# Altium PCB battery-module-60mm-side.PcbDoc
Units mm, origin at the board's own origin, x right, y up, seen from the top; angles counter-clockwise.
Board outline 52 x 21.2 mm, 2 copper layers (Top Layer, Bottom Layer), stack 1.591 mm thick; 29 components, 23 nets, 106 pads, 26 vias.
Unrouted connection lines stored in the file: 36.
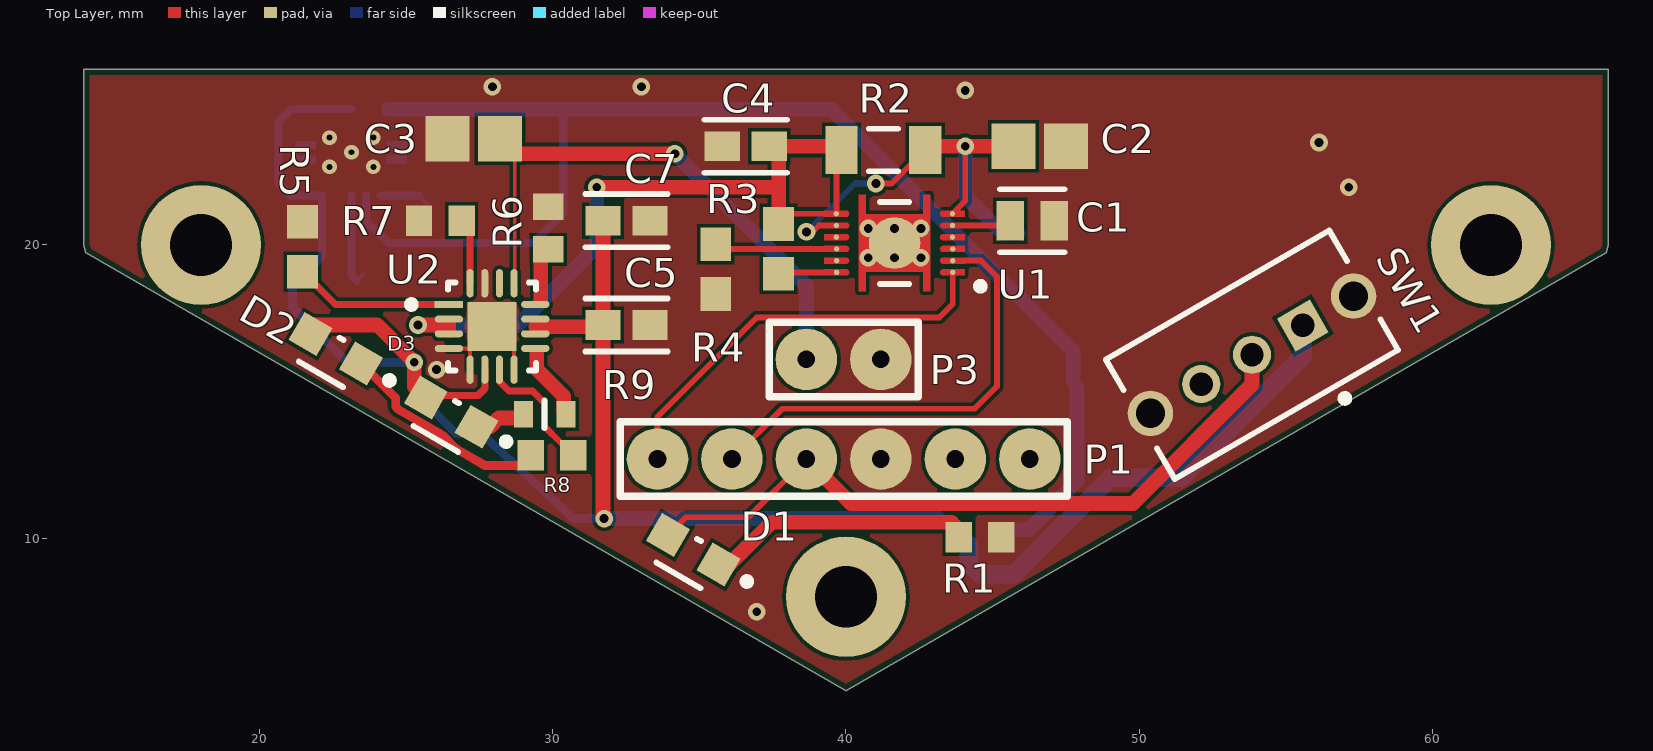
[diagram p0: Top Layer view]
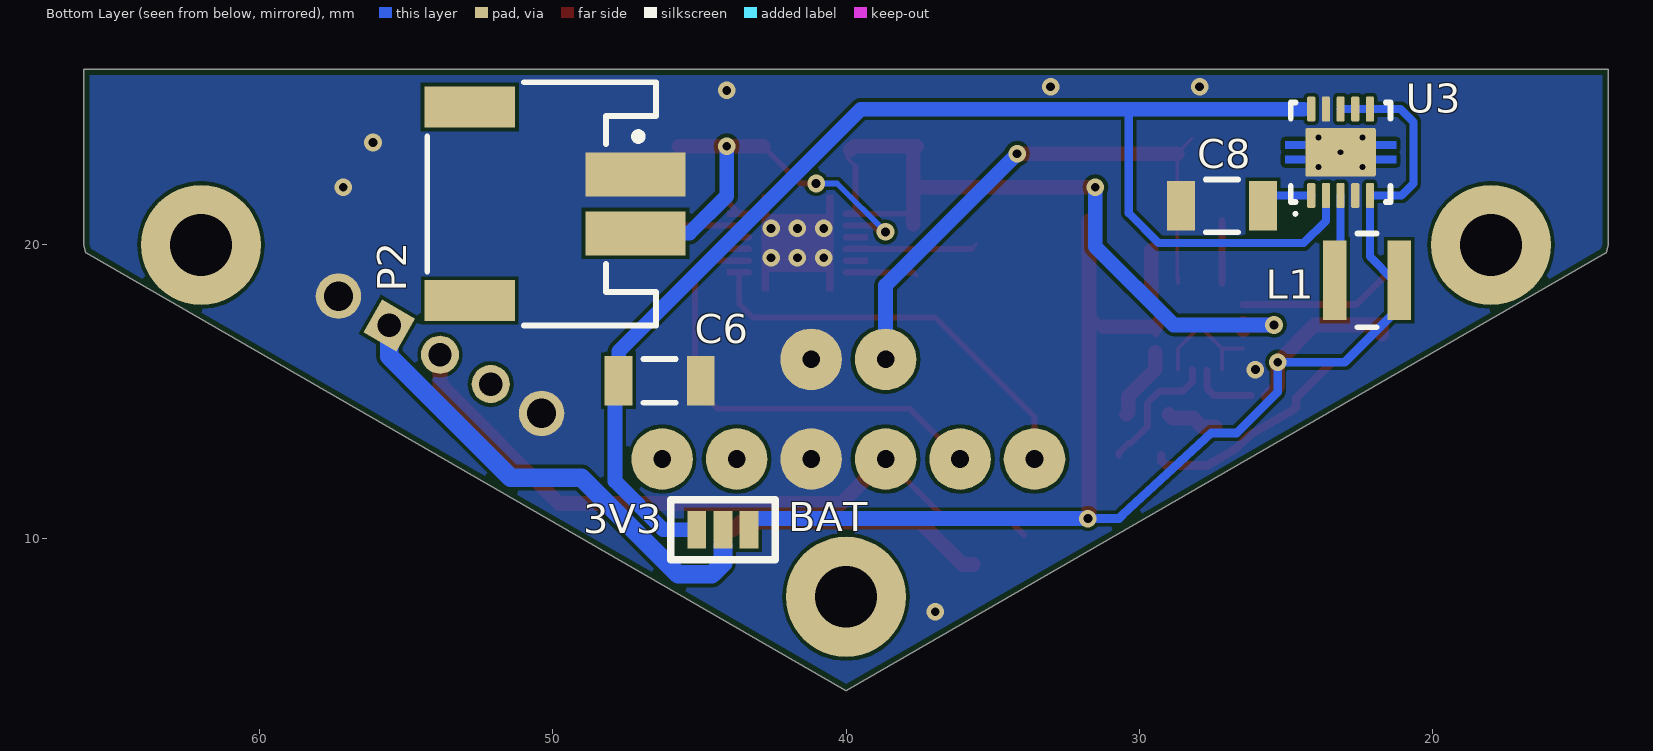
[diagram p1: Bottom Layer view, seen from below]
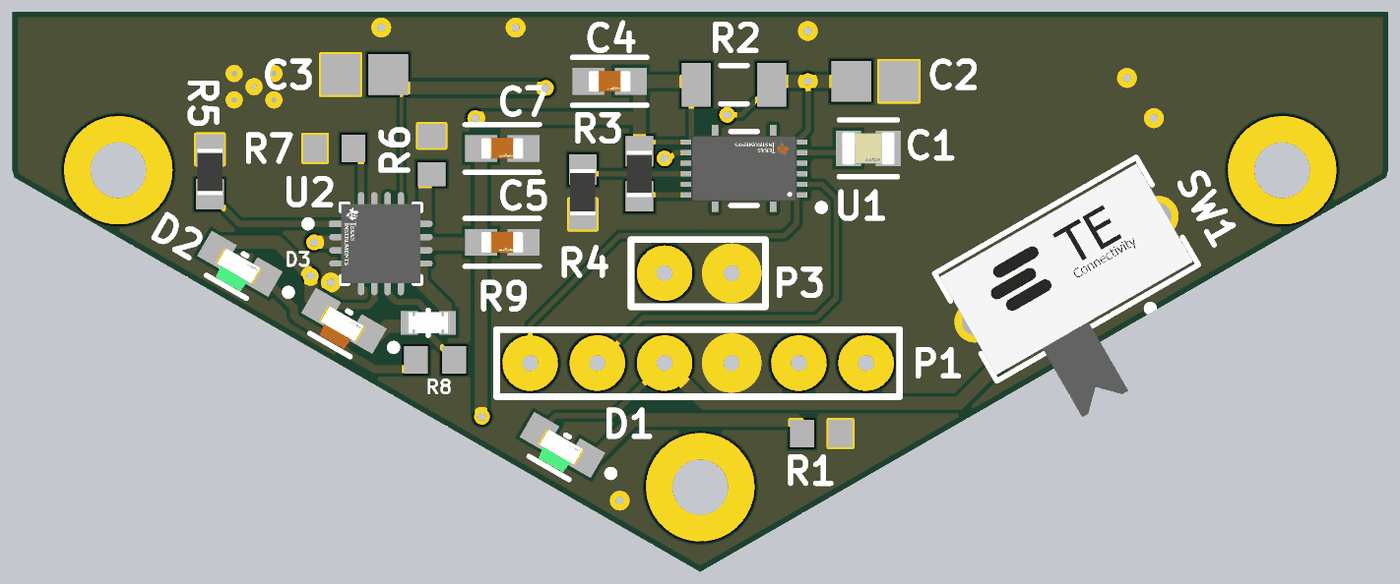
[diagram p2: 3D render of the assembled board from above, using the file's embedded part models]
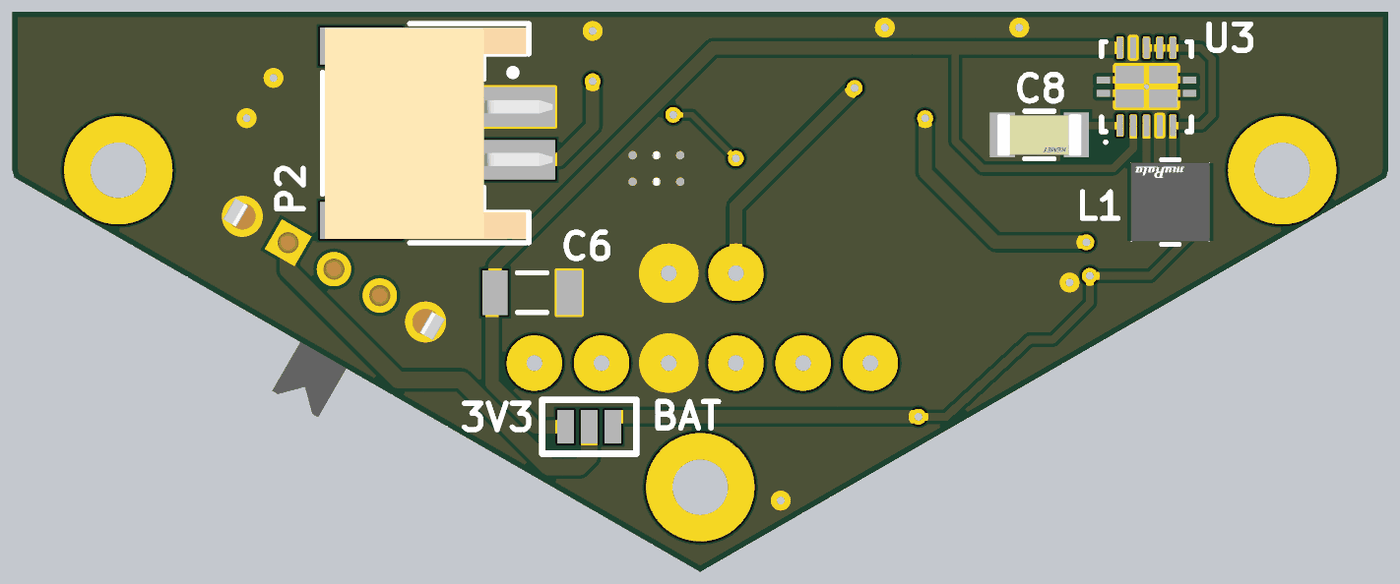
[diagram p3: 3D render of the assembled board from below, using the file's embedded part models]

## Layer stack, top to bottom
Top Solder: solder mask 0.0102, Solder Resist, Dk 3.5
Top Layer: signal copper 0.0356
Dielectric 1: dielectric 1.52, FR-4, Dk 4.8
Bottom Layer: signal copper 0.0356
Bottom Solder: solder mask 0.0102, Solder Resist, Dk 3.5

## Board outline
14.072,19.731 14,20 14,26 66,26 66,20 65.927,19.73 40,4.8

## Design rules (kind name [scope] priority, off if disabled: settings)
BoardOutlineClearance [All] p1: gap=0.2 ignorepadtopadclearanceinfootprint=FALSE
Clearance [All] p1: gap=0.127 ignorepadtopadclearanceinfootprint=FALSE except(0.25: Arc-Hole Track-Hole SMDPad-Hole THPad-Hole Via-Hole Fill-Hole Poly-Hole Region-Hole Text-Hole)
ComponentClearance [All] p1: gap=0.127 collisioncheckmode=3 verticalgap=0.127 showdistances=TRUE
DiffPairsRouting [All] p1: maxlimit=0.254 minlimit=0.127 mostfreqgap=0.127 toplayer_minwidth=0.127 toplayer_maxwidth=25.4 toplayer_prefwidth=0.127 bottomlayer_minwidth=0.127 bottomlayer_maxwidth=25.4 bottomlayer_prefwidth=0.127 maxuncoupledlength=12.7
Height [All] p1: minheight=0 maxheight=1816.048 prefheight=12.7
HoleSize [All] p1: absolutevalues=TRUE maxlimit=6.3 minlimit=0.3 maxpercent=80.000 minpercent=20.000
HoleToHoleClearance [All] p1: gap=0.25 allowstackedmicrovias=FALSE
MinimumAnnularRing [All] p1: minimumring=0.076
MinimumSolderMaskSliver [All] p1: minsoldermaskwidth=0
NetsToIgnore [InNet('GND')] p1:
PlaneClearance [All] p1: clearance=0.127
PlaneConnect PlaneConnectPowerPads [InPadClass('PowerPads')] p1: planeconnectstyle=Direct reliefexpansion=0.508 reliefentries=4 reliefconductorwidth=0.254 reliefairgap=0.254
PlaneConnect [All] p2: pad.planeconnectstyle=Relief pad.reliefexpansion=0.3 pad.reliefentries=4 pad.reliefconductorwidth=0.127 pad.reliefairgap=0.127 via.planeconnectstyle=Direct via.reliefexpansion=0.3 via.reliefentries=4 via.reliefconductorwidth=0.127 via.reliefairgap=0.127
PolygonConnect PolygonConnectPowerPads [All vs (InPadClass('PowerPads'))] p1: connectstyle=Direct reliefconductorwidth=0.254 reliefentries=4 polygonreliefangle="90 Angle" airgapwidth=0.254
PolygonConnect [All] p2: connectstyle=Direct reliefconductorwidth=0.2 reliefentries=4 polygonreliefangle="90 Angle" airgapwidth=0.127
RoutingLayers [InNet('GND')] p1: top layer_v5=FALSE bottom layer_v5=FALSE
RoutingPriority [InNet('GND')] p1: routingpriority=100
RoutingVias [All] p1: holewidth=0.3 width=0.6 viastyle="Through Hole" minholewidth=0.3 minwidth=0.6 maxholewidth=0.6 maxwidth=6.6
SilkToSilkClearance [All] p1: silktosilkclearance=0
SilkToSolderMaskClearance [IsPad] p1: minsilkscreentomaskgap=0.127 clearancetoexposedcopper=TRUE
SolderMaskExpansion [All] p1: expansion=0.075 istentingtop=FALSE
Width [All] p1: maxlimit=25.4 minlimit=0.127 preferedwidth=0.127 minimp=50.000000 maximp=50.000000 favimp=50.000000
18 further rules are at their usual default settings.

## Components (designator, comment, footprint, x,y, rotation, side; value= is the part's Value field where it differs from the comment)
3V3 "SJUMPER3POS" SJUMPER3POS-Footprint-1 44.196,10.287 r0 bottom (schematic designator SJ1)
C1 "C0805C474K4RACTU" FP-C0805C-DN-MFG 46.355,20.828 r180 top value="0.47 μF"
C2 "C0805C105K4PACTU" CAPC2013X145X50ML20T25 46.609,23.368 r180 top
C3 "C0805C105K4PACTU" CAPC2013X145X50ML20T25 27.305,23.622 r180 top
C4 "GRM188R60J106ME47D" FP-GRM188-0_1-e0_2_0_55-IPC_A 36.576,23.368 r0 top
C5 "GRM188R60J106ME47D" FP-GRM188-0_1-e0_2_0_55-IPC_A 32.512,17.272 r0 top
C6 "CAP 22uF 6.3V 1206(3216)" CAPC1206(3216)190_L 46.355,15.367 r0 bottom value=22uF
C7 "GRM188R60J106ME47D" FP-GRM188-0_1-e0_2_0_55-IPC_A 32.512,20.828 r0 top
C8 "C1206C104K1RACTU" FP-C1206C-EB-MFG 27.178,21.336 r0 bottom value="0.10 μF"
D1 "LTST-S270KGKT" FP-LTST-S270KGKT-MFG 34.671,9.398 r150 top
D2 "LTST-S270KGKT" FP-LTST-S270KGKT-MFG 22.479,16.256 r150 top
D3 "LTST-S270KRKT" FP-LTST-S270KRKT-MFG 26.416,14.097 r150 top
L1 "LQH3NPN2R2MJRL" FP-LQH3NPN_JR-MFG 22.225,18.796 r0 bottom
P1 "811-S1-006-30-015101" "New footprint 1" 39.92,12.7 r0 top
P2 "620102131822" 620102131822 50.382,21.4 r270 bottom
P3 "811-S1-002-30-015101" 811-S1-002-30-015101-Footprint-1 39.92,16.1 r0 top
R1 "ERJ-3EKF1001V" RESC1608X55X30ML15T15 44.577,10.033 r180 top
R2 "ERJ8BWFR010V" RESC3216X70X50NL05T20 41.275,23.241 r0 top
R3 "ERJ3EKF1002V" RESC1609X55X30ML15T15 37.701,19.866 r270 top
R4 "ERJ3EKF1002V" RESC1609X55X30ML15T15 35.56,19.177 r90 top
R5 "ERJ3EKF1002V" RESC1609X55X30ML15T15 21.463,19.939 r270 top
R6 "ERJ-3EKF1101V" RESC1608X55X30ML15T15 29.845,20.574 r270 top
R7 "ERJ-3EKF5903V" RESC1608X55X30ML15T15 26.162,20.828 r0 top
R8 "ERJ-3EKF1001V" RESC1608X55X30ML15T15 29.972,12.827 r180 top
R9 "ERJ3EKF1800V" FP-ERJ3EK-MFG 29.718,14.224 r180 top value=180Ω
SW1 "1825232-1" FP-1825232-1-MFG 53.848,16.256 r210 top
U1 "BQ27441DRZT-G1A" FP-DRZ0012A-MFG 41.656,20.066 r90 top
U2 "BQ24075RGTR" FP-RGT0016C-IPC_A 27.928,17.221 r0 top
U3 "TPS61201DRCT" DRC0010J_V 23.13,23.163 r90 bottom

## Footprints (in the part's own frame and the unit in brackets; to place one, negate y for a bottom-side part, rotate by r counter-clockwise, add the part's x,y. Pads: shape width x height; smd on the part's side, far side on the other; paste and mask are expansions set on the pad)
811-S1-002-30-015101-Footprint-1 [mm]
  round 2.1 hole 0.6: 1(-1.27,0) 2(1.27,0)
  silkscreen extent -2.54,-1.27 2.54,1.27
620102131822 [mm] "2.00mm SMT Male Horizontal Shrouded Header, 2p"
  rect 1.5x3.4 smd: 1(-1,3.2) 2(1,3.2)
  rect 1.4x3.1 smd: MP1(-3.3,-2.45) MP2(3.3,-2.45)
  silkscreen extent -4.15,-3.9 4.15,3.9, body extent -4,-3.8 4,4.8, height 5.57
CAPC1206(3216)190_L [mm] "Chip Capacitor, Body 3.2x1.6mm, Height 1.9mm, IPC High Density"
  rect 0.95x1.7 smd: 1(-1.4,0) 2(1.4,0)
  silkscreen extent -0.55,-0.75 0.55,0.75, body extent -1.7,-0.9 1.7,0.9, height 1.9
CAPC2013X145X50ML20T25 [mm] "Chip Capacitor, 2-Leads, Body 2.00x1.25mm, IPC Low Density"
  rect 1.5x1.55 smd: 1(-0.9,0) 2(0.9,0)
  body extent -1.1,-0.72 1.1,0.72, height 1.45
DRC0010J_V [mm] "SON, 10-Leads, Body 3x3mm, Pitch 0.5mm, Thermal Pad 2.4x1.65mm, TI Recommended"
  rrect36% 0.85x0.28 smd paste-0.025 mask+0.07: 1(-1.475,1) 2(-1.475,0.5) 3(-1.475,0) 4(-1.475,-0.5) 5(-1.475,-1) 6(1.475,-1) 7(1.475,-0.5) 8(1.475,0) 9(1.475,0.5) 10(1.475,1)
  rrect6% 1.65x2.4 smd paste-0.825 mask+0.07: 11(0,0)
  Top Layer region: -0.39,-1.2 -0.11,-1.2 -0.11,-1.9 -0.39,-1.9
  Top Layer region: 0.39,-1.9 0.11,-1.9 0.11,-1.2 0.39,-1.2
  Top Layer region: 0.39,1.2 0.11,1.2 0.11,1.9 0.39,1.9
  Top Layer region: -0.39,1.9 -0.11,1.9 -0.11,1.2 -0.39,1.2
  silkscreen extent -2.15,-1.7 1.7,1.7, body extent -1.55,-1.55 1.55,1.55, height 1
FP-1825232-1-MFG [mm]
  rect 1.3x1.3 hole 0.8 paste-1000 mask+0: 1(-2,0)
  round 1.3 hole 0.8 paste-1000 mask+0: 2(0,0) 3(2,0)
  round 1.55 hole 1 paste-1000 mask+0: 4(-4,0) 5(4,0)
  silkscreen extent -4.4,-2.35 4.4,3, body extent -4.87,-5.45 4.87,2.45, height 0.25
FP-C0805C-DN-MFG [mm]
  rect 0.95x1.35 smd paste+0 mask+0: 1(-0.75,0) 2(0.75,0)
  silkscreen extent -1.1,-1.07 1.1,1.07, body extent -1,-0.63 1,0.63, height 0.88
FP-C1206C-EB-MFG [mm]
  rect 0.95x1.7 smd paste+0 mask+0: 1(-1.4,0) 2(1.4,0)
  silkscreen extent -0.55,-0.9 0.55,0.9, body extent -1.6,-0.8 1.6,0.8, height 0.88
FP-DRZ0012A-MFG [mm]
  round 0.18 smd paste-1000 mask+0: 1(-1,-1.985) 2(-0.6,-1.985) 3(-0.2,-1.985) 4(0.2,-1.975) 5(0.6,-1.975) 6(1,-1.975) 7(1,1.985) 8(0.6,1.985) 9(0.2,1.985) 10(-0.2,1.975) 11(-0.6,1.975) 12(-1,1.975)
  round 1.755 smd paste-1000 mask+0: 13(0,0)
  Top Layer region: -0.9,2.4 -0.9,1.65 -0.913,1.6 -0.95,1.563 -1,1.55 -1,1.55 -1.038,1.558 -1.071,1.579 -1.092,1.612 -1.1,1.65 -1.1,1.65 -1.1,2.4
  Top Layer region: -0.5,2.4 -0.5,1.65 -0.513,1.6 -0.55,1.563 -0.6,1.55 -0.6,1.55 -0.638,1.558 -0.671,1.579 -0.692,1.612 -0.7,1.65 -0.7,1.65 -0.7,2.4
  Top Layer region: -0.1,2.4 -0.1,1.65 -0.113,1.6 -0.15,1.563 -0.2,1.55 -0.2,1.55 -0.238,1.558 -0.271,1.579 -0.292,1.612 -0.3,1.65 -0.3,1.65 -0.3,2.4
  Top Layer region: 0.3,2.4 0.3,1.65 0.287,1.6 0.25,1.563 0.2,1.55 0.2,1.55 0.162,1.558 0.129,1.579 0.108,1.612 0.1,1.65 0.1,1.65 0.1,2.4
  Top Layer region: 0.7,2.4 0.7,1.65 0.687,1.6 0.65,1.563 0.6,1.55 0.6,1.55 0.562,1.558 0.529,1.579 0.508,1.612 0.5,1.65 0.5,1.65 0.5,2.4
  Top Layer region: 1.1,2.4 1.1,1.65 1.087,1.6 1.05,1.563 1,1.55 1,1.55 0.962,1.558 0.929,1.579 0.908,1.612 0.9,1.65 0.9,1.65 0.9,2.4
  Top Layer region: 0.9,-2.4 0.9,-1.65 0.908,-1.612 0.929,-1.579 0.962,-1.558 1,-1.55 1,-1.55 1.038,-1.558 1.071,-1.579 1.092,-1.612 1.1,-1.65 1.1,-1.65 1.1,-2.4
  Top Layer region: 0.5,-2.4 0.5,-1.65 0.508,-1.612 0.529,-1.579 0.562,-1.558 0.6,-1.55 0.6,-1.55 0.638,-1.558 0.671,-1.579 0.692,-1.612 0.7,-1.65 0.7,-1.65 0.7,-2.4
  Top Layer region: 0.1,-2.4 0.1,-1.65 0.108,-1.612 0.129,-1.579 0.162,-1.558 0.2,-1.55 0.2,-1.55 0.238,-1.558 0.271,-1.579 0.292,-1.612 0.3,-1.65 0.3,-1.65 0.3,-2.4
  Top Layer region: -0.3,-2.4 -0.3,-1.65 -0.292,-1.612 -0.271,-1.579 -0.238,-1.558 -0.2,-1.55 -0.2,-1.55 -0.162,-1.558 -0.129,-1.579 -0.108,-1.612 -0.1,-1.65 -0.1,-1.65 -0.1,-2.4
  Top Layer region: -0.7,-2.4 -0.7,-1.65 -0.692,-1.612 -0.671,-1.579 -0.638,-1.558 -0.6,-1.55 -0.6,-1.55 -0.562,-1.558 -0.529,-1.579 -0.508,-1.612 -0.5,-1.65 -0.5,-1.65 -0.5,-2.4
  Top Layer region: -1.1,-2.4 -1.1,-1.65 -1.092,-1.612 -1.071,-1.579 -1.038,-1.558 -1,-1.55 -1,-1.55 -0.962,-1.558 -0.929,-1.579 -0.908,-1.612 -0.9,-1.65 -0.9,-1.65 -0.9,-2.4
  Top Layer region: -1.65,1.225 1.65,1.225 1.65,0.975 0.975,0.975 0.975,-0.975 1.65,-0.975 1.65,-1.225 -1.65,-1.225 -1.65,-0.975 -0.975,-0.975 -0.975,0.975 -1.65,0.975 -1.65,1.225
  silkscreen extent -1.6,-3.05 1.4,0.5, body extent -1.25,-2 1.25,2, height 1
FP-ERJ3EK-MFG [mm]
  rect 0.65x0.9 smd paste+0 mask+0: 1(-0.725,0) 2(0.725,0)
  silkscreen extent 0,-0.47 0,0.47, body extent -1.15,-0.58 1.15,0.58, height 0.25
FP-GRM188-0_1-e0_2_0_55-IPC_A [mm]
  rect 1.208x1.012 smd paste+0 mask+0: 1(-0.802,0) 2(0.802,0)
  silkscreen extent -1.41,-0.91 1.41,0.91, body extent -0.8,-0.4 0.8,0.4, height 0.9
FP-LQH3NPN_JR-MFG [mm]
  rect 0.8x2.7 smd paste+0 mask+0: 1(-1.1,0) 2(1.1,0)
  silkscreen extent -0.33,-1.6 0.33,1.6, body extent -1.5,-1.5 1.5,1.5, height 1.2
FP-LTST-S270KGKT-MFG [mm]
  rect 1.1x1.1 smd paste+0 mask+0: 1(-1,-0.235) 2(1,-0.235)
  silkscreen extent -2.25,-0.62 0.88,0.78, body extent -1.65,-0.88 1.65,0.73, height 0.25
FP-LTST-S270KRKT-MFG [mm]
  rect 1.1x1.1 smd paste+0 mask+0: 1(-1,-0.235) 2(1,-0.235)
  silkscreen extent -2.25,-0.63 0.88,0.83, body extent -1.65,-0.88 1.65,0.73, height 0.25
FP-RGT0016C-IPC_A [mm]
  rect 0.966x0.239 smd paste+0 mask+0: 1(-1.473,0.75)
  rrect100% 0.966x0.239 smd paste+0 mask+0: 2(-1.473,0.25) 3(-1.473,-0.25) 4(-1.473,-0.75) 9(1.473,-0.75) 10(1.473,-0.25) 11(1.473,0.25) 12(1.473,0.75)
  rrect100% 0.239x0.966 smd paste+0 mask+0: 5(-0.75,-1.473) 6(-0.25,-1.473) 7(0.25,-1.473) 8(0.75,-1.473) 13(0.75,1.473) 14(0.25,1.473) 15(-0.25,1.473) 16(-0.75,1.473)
  rect 1.68x1.68 smd paste-1000 mask+0: 17(0,0)
  silkscreen extent -2.88,-1.5 1.5,1.5, body extent -2.46,-2.46 2.46,2.46, height 0.25
"New footprint 1" [mm]
  round 2.1 hole 0.6: 1(-6.35,0) 2(-3.81,0) 3(-1.27,0) 4(1.27,0) 5(3.81,0) 6(6.35,0)
  silkscreen extent -7.62,-1.27 7.62,1.27
RESC1608X55X30ML15T15 [mm] "Chip Resistor, 2-Leads, Body 1.60x0.80mm, IPC Low Density"
  rect 0.9x1.05 smd: 1(-0.725,0) 2(0.725,0)
  body extent -0.87,-0.48 0.87,0.48, height 0.55
RESC1609X55X30ML15T15 [mm] "Chip Resistor, 2-Leads, Body 1.75x0.95mm, IPC Low Density"
  rect 1.15x1.05 smd: 1(-0.85,0) 2(0.85,0)
  body extent -0.87,-0.48 0.87,0.48, height 0.55
RESC3216X70X50NL05T20 [mm] "Chip Resistor, 2-Leads, Body 3.20x1.60mm, IPC Medium Density"
  rect 1.1x1.65 smd: 1(-1.425,0) 2(1.425,0)
  silkscreen extent -0.5,-0.73 0.5,0.73, body extent -1.63,-0.82 1.62,0.82, height 0.7
SJUMPER3POS-Footprint-1 [mil]
  rect 25x50 smd: 1(-35,0) 2(0,0) 3(35,0)
  silkscreen extent -70,-40 70,40

## Part data
3V3: library part CMP-001-0001-1, "3 pins solder jumper"
C1: library part CMP-2007-03296-2, "CAP CER 0.47UF 16V 10% X7R 0805", Capacitance="0.47 μF", Manufacturer=KEMET, Package=C0805C-DN, Temperature="-55°C to +125°C", Temperature Characteristic=X7R, Temperature Coefficient=30ppm/°C, Temperature Range High=+125°C, Temperature Range Low=-55°C, Tolerance=0.1, Voltage Rating="16 V", Automotive=No, Category=Cap, ComponentLink2Description=Datasheet, ComponentLink2URL=https://content.kemet.com/datasheets/KEM_C1003_C0G_SMD.pdf, Device Class L1="Passive Components", Device Class L2=Capacitors, Device Class L3="Ceramic Capacitors", Digikey Description="CAP CER 0.47UF 16V 10% X7R 0805", Height=0.88mm, Ipc Land Pattern Name=CAPC200125X78, Lead Free=Yes, Manufacturer Part Number=C0805C474K4RACTU, Material=Ceramic, Mouser Description="Multilayer Ceramic Capacitor, C Series, 0.47 - F, - 10%, X7r, 16 V, 0805 [2012 Metric] Rohs Compliant: Yes", Octopart=https://octopart.com/c0805c474k4ractu-kemet-107561, RoHS=TRUE
C2 C3: library part CMP-1036-04746-2, Manufacturer=Kemet, Part Number=C0805C105K4PACTU
C4 C5 C7: library part CMP-2006-02792-2, "Chip Multilayer Ceramic Capacitors for General Purpose, 0603, 10uF, X5R, 15%, 20%, 6.3V", Capacitance=10uF, Case Code (Imperial)=0603, Case Code (Metric)=1608, Dielectric=X5R, Max Operating Temperature=85°C, Min Operating Temperature=-55°C, Package Quantity=4000, Tolerance=20%, Voltage=6.3V, Case/Package=0603, Depth=0.8mm, Height=0.8mm, Lead Free="Lead Free", Length=1.6mm, Material=Ceramic, Mount="Surface Mount", Packaging="Tape and Reel", Radiation Hardening=No, REACH SVHC="No SVHC", Termination=SMD/SMT, Thickness=0.035inch, Voltage Rating=6.3V, Voltage Rating (DC)=6.3V, Width=0.031inch
C6: library part CMP-1037-04986-1, "CAP 22uF 6.3V ±20% 1206 (3216 Metric) Thickness 1.9mm SMD", Case-EIA=1206, Case-Metric=3216, Rated Voltage="6.3 V", Tolerance=Â±20%, Max Thickness="1.9 mm", Technology=SMT
C8: library part CMP-03020-000153-1, "CAP CER 0.1UF 100V X7R 1206", Capacitance="0.10 μF", Manufacturer=KEMET, Package=C1206C-EB, Temperature="-55°C to +150°C", Temperature Characteristic=X7R, Temperature Coefficient=15%, Temperature Range High=+150°C, Temperature Range Low=-55°C, Tolerance=0.1, Voltage Rating="100 V", Automotive=Yes, Automotive Grade="Grade 0", Category=Cap, ComponentLink2Description=Datasheet, ComponentLink2URL=https://content.kemet.com/datasheets/KEM_C1007_X8R_ULTRA_150C_SMD.pdf, Device Class L1="Passive Components", Device Class L2=Capacitors, Device Class L3="Ceramic Capacitors", Digikey Description="CAP CER 0.1UF 100V X7R 1206", Height=0.88mm, Ipc Land Pattern Name=CAPC320160X78, Lead Free=Yes, Manufacturer Part Number=C1206C104K1RACTU, Material=Ceramic, Mouser Description="CAP CER 0.1UF 100V X7R 1206", Octopart=https://octopart.com/c1206c104k1ractu-kemet-89521, RoHS=TRUE
D1 D2: library part CMP-2000-06629-2, "LED GREEN CLEAR CHIP SMD R/A", Case Code (Imperial)=0603, Case Code (Metric)=1608, Color=Green, Forward Current=30mA, Forward Voltage=2V, Lens Color=Colorless, Max Operating Temperature=85°C, Min Operating Temperature=-55°C, Package Quantity=1, Power Dissipation=75mW, Reverse Voltage=5V, Test Current=20mA, Case/Package=0603, Depth=0.6mm, Dominant Wavelength=571nm, Height=0.6mm, Illumination Color=Green, Lead Free="Lead Free", Length=1.6mm, Lens Style=Diffused, Lens Transparency=Clear, Luminous Intensity=71mcd, Mount="Surface Mount", Number of Elements=1, Number of LEDs=1, Number of Pins=2, Packaging="Tape and Reel", Power Rating=75mW, Radiation Hardening=No, Viewing Angle=130°, Wavelength=574nm, Width=1.15mm
D3: library part CMP-2000-06630-2, "LED RED CLEAR CHIP SMD R/A", Case Code (Imperial)=0603, Case Code (Metric)=1608, Color=Red, Forward Current=30mA, Forward Voltage=2V, Lens Color=Colorless, Max Operating Temperature=85°C, Max Power Dissipation=75mW, Min Operating Temperature=-55°C, Package Quantity=1, Reverse Voltage=5V, Test Current=20mA, Case/Package=0603, Depth=0.6mm, Dominant Wavelength=631nm, Height=0.6mm, Illumination Color=Red, Lead Free="Lead Free", Length=1.6mm, Lens Style=Diffused, Lens Transparency=Clear, Luminous Intensity=54mcd, Mount="Surface Mount", Number of Elements=1, Number of LEDs=1, Number of Pins=2, Packaging="Tape and Reel", Power Dissipation=75mW, Power Rating=75mW, Radiation Hardening=No, Viewing Angle=130°, Wavelength=639nm, Width=1.15mm
L1: library part CMP-06042-014664-1, "Wire Wound Ferrite Inductor for Power Lines 2.2μH ±20% 0.0816Ω 2200mA 1212", Case Code (Imperial)=1212, Case Code (Metric)=3030, Current Rating=980mA, DC Resistance (DCR)=81.6mR, Inductance=2.2uH, Max Operating Temperature=105°C, Min Operating Temperature=-40°C, Resistor Type=Wirewound, Saturation Current=1.8A, Self Resonant Frequency=45MHz, Test Frequency=1MHz, Tolerance=20%, Case/Package=1212, Core Material=Ferrite, Height - Seated (Max)=0.047inch, Length=0.118inch, Mount="Surface Mount", Packaging="Tape and Reel", Shielding=Shielded, Width=0.118inch
P1: library part CMP-002-00071-2, "Conn Spring Piston 6POS SMD"
P2: library part CMP-1502-00669-1, "Male Shrouded Header WR-WTB, SMT, Right Angled, pitch 2 mm, 1 x 2 position", Contact Resistance=20mOhm, Manufacturer="Wurth Elektronik", Operating Temperature=-25to85degC, Working Voltage=100VAC, Datasheet URL=https://katalog.we-online.de/em/datasheet/6201xx131822.pdf, Gender=Male, Manufacturer URL=http://www.we-online.de, Mounting Technology=SMT, Orientation=RightAngled, Package Reference=620102131822, Packaging=TapeandReel, Part Number=620102131822, Pitch=2mm, Position=1x2, Publisher=WurthElektronik
P3: library part CMP-002-00073-2, "Conn Spring Loaded Connector HDR 2 POS 2.54mm Solder ST SMD T/R"
R1 R8: library part CMP-2000-00180-1, Manufacturer=Panasonic, Part Number=ERJ-3EKF1001V
R2: library part CMP-2003-00764-1, Manufacturer=Panasonic, Part Number=ERJ8BWFR010V
R3 R4 R5: library part CMP-1012-00623-3, "Chip Resistor, 10 KOhm, +/- 1%, 0.1 W, -55 to 155 degC, 0603 (1608 Metric), RoHS, Tape and Reel", Case Code (Imperial)=0603, Case Code (Metric)=1608, Manufacturer=Panasonic, Max Operating Temperature=155degC, Max Power Dissipation=100mW, Min Operating Temperature=-55degC, Package Description="2-Pin Surface Mount Device, Body 1.6 x 0.85 mm", Package Quantity=1, Package Reference=603, Resistance=10KOhm, Temperature Coefficient=100ppm\/degreesC, Tolerance=1%, Voltage Rating=75V, Case\/Package=0603, Composition=ThickFilm, Contact Plating=Tin, Datasheet URL=https://industrial.panasonic.com/cdbs/www-data/pdf/RDA0000/AOA0000C304.pdf, Datasheet Version=02/2017, Depth=0.8mm, Height=0.45mm, Lead Free=LeadFree, Length=1.6mm, Manufacturer URL=http://www.panasonic.com/, Military Standard=Not, Mount=SurfaceMount, Mounting Technology=SurfaceMount, Number of Pins=2, Number of Terminations=2, Packaging=TapeandReel, Power Rating=100mW, Radiation Hardening=No, REACH SVHC=NoSVHC, RoHSCompliant=true, Termination=SMD/SMT, Voltage Rating (DC)=75V, Width=0.031inch
R6: library part CMP-2000-00198-1, Manufacturer=Panasonic, Part Number=ERJ-3EKF1101V
R7: library part CMP-2000-00582-1, Manufacturer=Panasonic, Part Number=ERJ-3EKF5903V
R9: library part CMP-2000-00293-2, "RES SMD 180 OHM 1% 1/10W 0603", Manufacturer=Panasonic, Package=ERJ3EK, Power Rating=0.1W, Resistance=180Ω, Temperature="-55°C to +155°C", Temperature Coefficient=100ppm/°C, Temperature Range High=+155°C, Temperature Range Low=-55°C, Tolerance=1%, Voltage Rating=75V, Automotive=Yes, Automotive Grade="Grade 0", Category=Res, ComponentLink2Description=Datasheet, ComponentLink2URL=https://industrial.panasonic.com/cdbs/www-data/pdf/RDA0000/AOA0000C304.pdf, Composition="Thick Film", Device Class L1="Passive Components", Device Class L2=Resistors, Device Class L3="Chip SMD Resistors", Digikey Description="RES SMD 180 OHM 1% 1/10W 0603", Footprint Url=https://industrial.panasonic.com/cdbs/www-data/pdf/RDA0000/DMA0000COL17.pdf, Height=0.55mm, Lead Free=Yes, Manufacturer Part Number=ERJ3EKF1800V, Mouser Description="Thick Film Resistors 0603 180ohms 1% AEC-Q200", Octopart=https://octopart.com/erj-3ekf1800v-panasonic-55421532, RoHS=TRUE, Series=ERJ
SW1: library part CMP-03405-000001-1, "SWITCH SLIDE SPDT 200MA 30V", Contact Current Rating=0.2A, Contact Resistance=20mΩ, Manufacturer="TE Connectivity", Operating Force=200gf, Temperature="-20°C to +70°C", Temperature Range High=+70°C, Temperature Range Low=-20°C, Voltage Rating Dc=30V, Automotive=No, Category=Switch, ComponentLink2Description=Datasheet, ComponentLink2URL=https://www.te.com/commerce/DocumentDelivery/DDEController?Action=showdoc&DocId=Customer+Drawing%7F1825232%7FB2%7Fpdf%7FEnglish%7FENG_CD_1825232_B2.pdf%7F1825232-1, Device Class L1=Electromechanical, Device Class L2=Switches, Device Class L3="Slide Switches", Digikey Description="SWITCH SLIDE SPDT 200MA 30V", Electromechanical Life=10000Cycles, Height=3.7mm, Lead Free=Yes, Manufacturer Part Number=1825232-1, Mount="Through Hole", Mouser Description="Slide Switches SLIDE SWITCH SPDT Right Angle", Octopart=https://octopart.com/1825232-1-te+connectivity-45209882, Package=1825232-1, RoHS=TRUE, Throw Configuration=SPDT
U1: library part CMP-04911-000005-1, "IC BATT FUEL GAUGE LICOO2 12SON", Ambient Temperature Range High=+85°C, Ambient Temperature Range Low=-40°C, Manufacturer="Texas Instruments", Max Supply Voltage=4.5V, Min Supply Voltage=2.45V, Nominal Supply Current=93uA, Output Voltage=1.8V, Package=DRZ0012A, Temperature="-40°C to +85°C", Automotive=No, Category=IC, ComponentLink2Description=Datasheet, ComponentLink2URL=http://www.ti.com/lit/ds/symlink/bq27441-g1.pdf, Device Class L1="Integrated Circuits (ICs)", Device Class L2="Power Management ICs", Device Class L3="Battery Management", Digikey Description="IC BATT FUEL GAUGE LICOO2 12SON", Height=1mm, Lead Free=Yes, Manufacturer Part Number=BQ27441DRZT-G1A, Mouser Description="Battery Management System-Side Impdance Trck Bttry Fuel Gge", Number of Cells=1, Number Of Outputs=1, Octopart=https://octopart.com/bq27441drzt-g1a-texas+instruments-30555831, RoHS=TRUE, Standoff Height=0mm, Temperature Range High=+85°C, Temperature Range Low=-40°C
U2: library part CMP-0321-00238-3, "IC LI-ION CHARGE MGMT 16-QFN", Battery Pack Voltage=4.2V, Case/Package=VQFN, Max Charge Current=1.5A, Max Operating Temperature=125°C, Max Supply Voltage=6.4V, Min Input Voltage=4.3V, Min Operating Temperature=-40°C, Min Supply Voltage=4.35V, Package Quantity=3000, Battery Chemistry=LITHIUM-ION, Contact Plating=Gold, Fault Protection="Over Voltage", Interface=USB, Lead Free="Lead Free", Number of Cells=1, Number of Pins=16, Output Current=1.5A, Output Voltage=4.2V, Packaging="Tape and Reel", Radiation Hardening=No, RoHS Compliant=Yes, Series=-, Weight=0.000808oz
U3: library part CMP-0343-00033-2, "Boost Voltage Converter with 0.3 to 5.5 V Input and 3.3 V Output, -40 to 85 degC, 10-Pin SON (DRC), Green (RoHS & no Sb/Br)", Manufacturer="Texas Instruments", Switching Frequency(Max)(kHz)=1250, ComponentLink1Description=Datasheet, ComponentLink1URL=http://www.ti.com/general/docs/lit/getliterature.tsp?genericPartNumber=TPS61201&fileType=pdf, ComponentLink2Description="Package Specification", ComponentLink2URL=http://www.ti.com/litv/pdf/mpds117k, DatasheetVersion=SLVS577B, Eco-Plan="Green (RoHS & no Sb/Br)", Mounting Technology="Surface Mount", PackageDescription="10-Pin Plastic Small Outline No-Lead, 3 x 3 x 1 mm Body, 0.5 mm Pitch, Exposed Pad", PackageReference=DRC0010J, PackageVersion="revL, Sep-2011", PartNumber=TPS61201DRCT, Preset Vout(V)=3.3, Regulated Outputs(#)=1, SubFamily="Step-Up Regulator", Synchronous Rectification=TRUE, Topology=Boost, Vin(Max)(V)=5.5, Vin(Min)(V)=0.3, Vout(Max)(V)=3.3, Vout(Min)(V)=3.3

## Free pads (board coordinates)
  round 4.1 hole 2.1: 1(40,8) 2(18,20) 3(62,20)

## Via types
v1: diameter 0.6, hole 0.3, Top Layer to Bottom Layer, 21 vias
v2: diameter 0.5, hole 0.2, Top Layer to Bottom Layer, 5 vias

## Nets (pads, with @x,y where several pads share a name; then routed paths per layer and width w, separated by ;. In a path a pad name is that pad's centre, name@x,y a point inside that pad or via, vN(x,y) a via of type N, cw(c..) or ccw(c..) an arc to the next point about the centre after c; other vN are vias at no path point)
3V3: 3V3.3 C6.2 U3.2 U3.10 | length 48.2
  Bottom Layer w0.28: U3.2 23.63,20.82 24.387,20.063 29.334,20.063 30.353,21.082 30.353,24.634 32.002,24.634 ; C6.2@47.628,15.367 47.691,15.303 C6.2@47.879,15.116
  Bottom Layer w0.5: 24.384,24.634 31.919,24.634 ; 32.03,24.634 39.501,24.634 47.755,16.38 C6.2 ; 3V3.3 46.228,10.287 47.879,11.938 C6.2@47.879,15.116
GND: C1.1 C2.1 C3.2 C4.1 C5.2 C6.1 C7.2 C8.2 P1.4 P2.1 P3.2 R1.1 R4.1 R5.1 R6.1 R7.1 SW1.4 SW1.5 U1.3 U1.13 U2.4 U2.5 U2.8 U2.15 U2.17 U3.4 U3.9 U3.11 | length 4.3
  Top Layer w0.127: U2.4 U2.17@27.178,16.471 ; U2.5 U2.17@27.178,16.471 ; U2.8 28.678,16.471 U2.17 U2.17@27.178,16.471
  other v1: 36.957,7.493 26.035,15.748 40.756,19.566 41.656,19.566 42.556,19.566 40.756,20.566 41.656,20.566 42.556,20.566 57.15,21.971 56.134,23.495 44.069,25.273 27.94,25.4 33.02,25.4
  other v2: 22.38,22.663 23.88,22.663 23.13,23.163 22.38,23.663 23.88,23.663
NetC1_2: C1.2 U1.5 | length 2
  Top Layer w0.127: C1.2@45.443,20.666 C1.2
  Top Layer w0.2: U1.5 C1.2@45.443,20.666
NetC2_2: C2.2 P2.2 R2.2 U1.6 U1.8 | length 15.9
  Top Layer w0.127: v1(38.653,20.447) v1@38.857,20.447 ; R2.2 R2.2@42.827,23.368
  Top Layer w0.2: v1@38.857,20.447 39.076,20.666 U1.8 ; v1(41.021,22.098) 41.557,22.098 R2.2 ; U1.6 44.069,21.504 v1(44.069,23.368)
  Top Layer w0.5: R2.2@42.827,23.368 v1(44.069,23.368) C2.2
  Bottom Layer w0.2: v1(38.653,20.447) 40.304,22.098 v1(41.021,22.098)
  Bottom Layer w0.5: v1(44.069,23.368) 44.069,21.671 45.34,20.4 P2.2@45.875,20.4
NetC3_1: C3.1 P3.1 U2.13 | length 19.5
  Top Layer w0.127: C3.1 28.702,23.125 28.702,23.103 28.702,18.923 28.678,18.899 U2.13
  Top Layer w0.5: C3.1@28.702,23.103 28.713,23.114 v1(34.163,23.114)
  Bottom Layer w0.5: v1(34.163,23.114) 38.65,18.627 P3.1
NetC5_1: 3V3.1 C5.1 C7.1 D2.2 D3.2 L1.1 U2.6 U2.10 U2.11 U3.5 U3.6 U3.7 U3.8 | length 57.4
  Top Layer w0.239: D3.2@26.176,14.859 27.44,14.859 27.679,15.098 U2.6@27.679,15.725 ; U2.11 29.418,17.455 29.418,17.213 U2.10@29.418,16.971 ; C5.1@31.23,17.213 C5.1@31.71,17.693
  Top Layer w0.5: D2.2 21.73,17.272 24.003,17.272 v1(25.273,16.002) 25.273,15.164 D3.2@25.588,14.849 ; 29.418,17.213 C5.1@31.23,17.213 ; C7.1 31.71,17.693 C5.1 31.71,10.708 v1(31.75,10.668)
  Bottom Layer w0.28: L1.1 21.32,18.796 22.13,19.606 U3.5 21.052,21.688 20.642,22.098 20.642,24.198 21.082,24.638 U3.6 U3.7 U3.8
  Bottom Layer w0.3: L1.1 21.125,17.864 22.987,16.002 v1(25.273,16.002) 25.273,14.986 26.67,13.589 27.538,13.589 30.565,10.795 30.692,10.668 v1(31.75,10.668)
  Bottom Layer w0.5: v1(31.75,10.668) 3V3.1@43.172,10.668
NetC8_1: C8.1 U3.1 | length 1.8
  Bottom Layer w0.127: C8.1@25.426,21.688 C8.1
  Bottom Layer w0.28: U3.1 C8.1@25.426,21.688
NetD1_1: D1.1 R1.2 | length 8.9
  Top Layer w0.5: D1.1 36.026,9.102 37.465,10.541 43.598,10.541 R1.2@43.852,10.287
NetD1_2: D1.2 P1.3 SW1.2 | length 25.3
  Top Layer w0.127: D1.2 D1.2@33.967,10.102 ; P1.3@38.1,12.7 P1.3
  Top Layer w0.2: D1.2 34.533,10.712 36.662,10.712 P1.3
  Top Layer w0.508: P1.3 40.174,11.176 49.784,11.176 53.848,15.24 SW1.2
  Bottom Layer w0.635: P1.3@38.65,12.361 P1.3
NetD2_1: D2.1 R8.2 | length 7.4
  Top Layer w0.3: D2.1 24.639,14.783 24.639,14.484 24.746,14.378 26.196,13.54 26.258,13.493 26.693,13.058 26.755,13.01 27.684,12.475 29.071,12.475 29.159,12.563 29.247,12.651 R8.2
NetD3_1: D3.1 R9.2 | length 1.8
  Top Layer w0.5: D3.1 27.863,13.801 28.162,14.099 28.868,14.099 R9.2
NetL1_2: L1.2 U3.3 | length 3.5
  Bottom Layer w0.127: L1.2@23.13,18.991 L1.2 L1.2@23.519,18.99
  Bottom Layer w0.28: U3.3 23.13,18.991 L1.2
NetP1_1: P1.1 U1.1 | length 14.2
  Top Layer w0.2: P1.1 33.57,14.139 36.957,17.526 43.18,17.526 43.641,17.987 U1.1
NetP1_2: P1.2 U1.2 | length 15.8
  Top Layer w0.2: P1.2 37.823,14.413 44.385,14.413 45.147,15.175 45.147,18.923 44.604,19.466 U1.2
  Bottom Layer w0.2: P1.2@36.11,12.414 P1.2
NetR3_2: R3.2 U1.12 | length 2.1
  Top Layer w0.127: R3.2@37.592,18.962 R3.2@37.696,19.066
  Top Layer w0.2: R3.2@37.696,19.066 U1.12
NetR4_2: R4.2 U1.10 | length 4.2
  Top Layer w0.127: R4.2 R4.2@35.721,19.866
  Top Layer w0.2: R4.2@35.721,19.866 U1.10
NetR5_2: R5.2 U2.1 | length 5.5
  Top Layer w0.239: R5.2 22.581,17.971 U2.1
NetR6_2: R6.2 U2.12 | length 1.7
  Top Layer w0.5: 29.591,18.101 R6.2@29.591,19.812
NetR7_2: R7.2 U2.16 | length 2.1
  Top Layer w0.239: U2.16 R7.2@27.178,20.828
NetR8_1: R8.1 U2.7 | length 4.5
  Top Layer w0.23: U2.7@28.178,15.746 28.18,15.745 28.18,15.348 28.504,15.023 29.311,15.023 29.718,14.616 29.718,13.806 30.287,13.237 30.362,13.237 30.697,12.902 R8.1
NetR9_1: R9.1 U2.9 | length 2.5
  Top Layer w0.5: 29.448,16.341 29.448,15.764 30.368,14.844 30.368,14.299 R9.1
NetSJ1_2: 3V3.2 SW1.1 | length 16.6
  Bottom Layer w0.127: SW1.1@55.372,17.048 SW1.1
  Bottom Layer w0.635: 3V3.2@44.196,9.779 44.196,9.144 44.577,8.763 45.72,8.763 49.022,12.065 51.435,12.065 54.229,14.859 55.58,16.21 SW1.1
V_BATT: C4.2 R2.1 R3.1 U1.7 U2.2 U2.3 | length 25.7
  Top Layer w0.127: U2.3 U2.3@26.455,17.041 ; R2.1@39.671,22.681 R2.1@39.977,22.987 ; R2.1@39.737,23.128 R2.1 39.85,23.213 R2.1@39.751,23.114
  Top Layer w0.2: R3.1@37.701,21.066 37.734,21.066 39.115,21.066 U1.7 R2.1@39.671,22.681
  Top Layer w0.5: v1(25.4,17.272) 26.154,17.272 ; 26.455,17.1 26.455,17.33 ; v1(31.496,21.971) 37.701,21.971 ; C4.2@37.592,23.368 39.723,23.368 R2.1 ; R3.1 37.701,21.066 37.701,21.971 ; C4.2@37.701,23.259 37.701,21.971
  Bottom Layer w0.5: v1(25.4,17.272) 28.829,17.272 31.496,19.939 v1(31.496,21.971)
pads on no net: P1.5 P1.6 P2.MP1 P2.MP2 SW1.3 U1.4 U1.9 U1.11 U2.14

## Polygon pours and split planes (outlines as drawn)
GND on Bottom Layer "GND_L02_P001" (solid, pour order 1): 14.072,19.731 14,20 14,26 66,26 66,20 65.927,19.73 40,4.8
GND on Top Layer "GND_L01_P000" (solid, pour order 0): 14.072,19.731 14,20 14,26 66,26 66,20 65.927,19.73 40,4.8

## Silkscreen, mask and mechanical layers (free items; w line width, h text height)
Mechanical 1:
  the board outline again, w0.001

## Text inside footprints (layer, text, board x,y; h text height)
3V3: Bottom Overlay "BAT" at 41.964,10.233 h1